# Altium PCB HLK-7621-ALL-KIT-V1.0.PcbDoc (part 1 of 2)
Units mm, origin at the board's own origin, x right, y up, seen from the top; angles counter-clockwise.
Board outline 140 x 100 mm, 2 copper layers (Top Layer, Bottom Layer); 111 components, 238 nets, 733 pads, 557 vias.
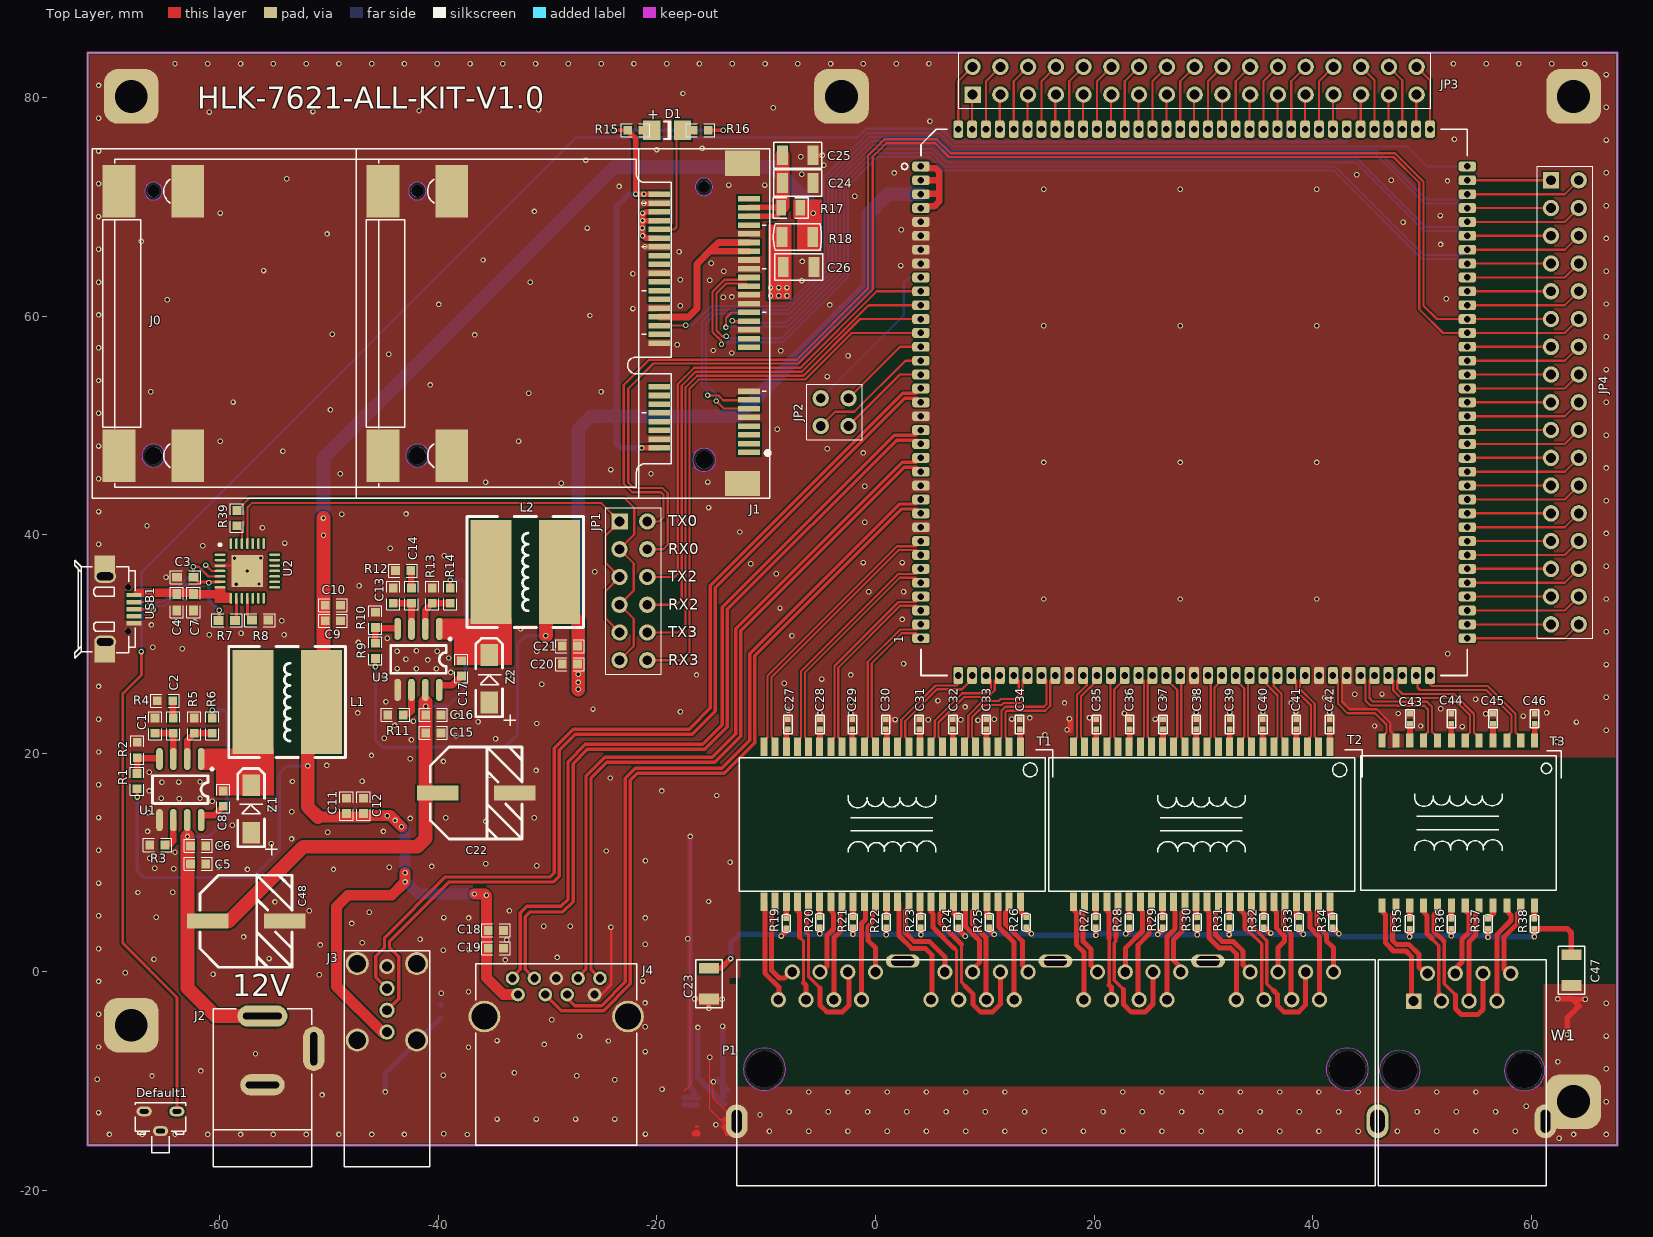
[diagram p0: Top Layer view]
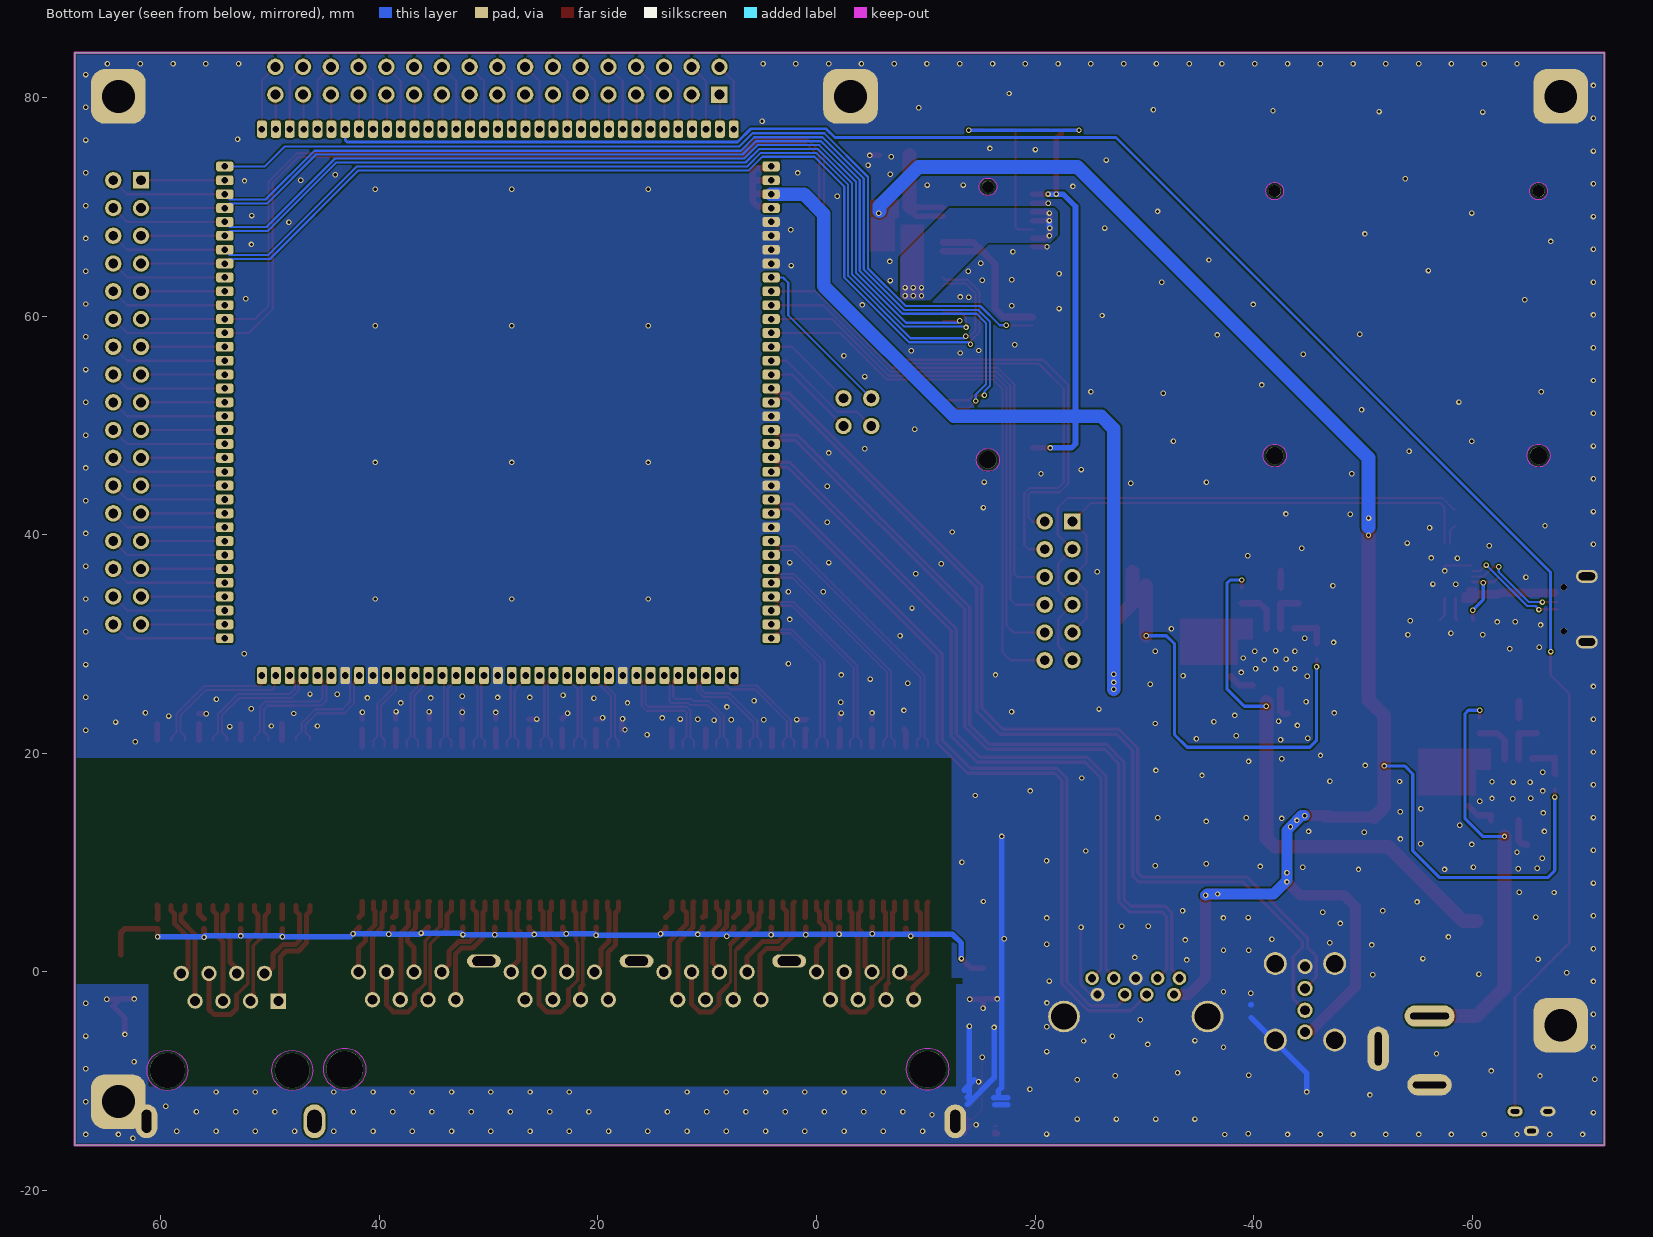
[diagram p1: Bottom Layer view, seen from below]

## Layer stack, top to bottom
Top Solder: solder mask 0.0102, Solder Resist, Dk 3.5
Top Layer: signal copper 0.0356
Dielectric1: core 0.32, FR-4, Dk 4.8
Bottom Layer: signal copper 0.0356
Bottom Solder: solder mask 0.0102, Solder Resist, Dk 3.5

## Board outline
-72.108,-15.865 67.892,-15.865 67.892,84.135 -72.108,84.135

## Design rules (kind name [scope] priority, off if disabled: settings)
Clearance [OnLayer('Keep-Out Layer')] p1: gap=0.102 ignorepadtopadclearanceinfootprint=FALSE except(0: Arc-Hole Track-Hole SMDPad-Hole THPad-Hole Via-Hole Fill-Hole Poly-Hole Region-Hole Text-Hole)
Clearance keepout [(HasFootprint('MICRO_USB'))] p2: gap=0.152 ignorepadtopadclearanceinfootprint=FALSE except(0: Arc-Hole Track-Hole SMDPad-Hole THPad-Hole Via-Hole Fill-Hole Poly-Hole Region-Hole Text-Hole)
Clearance polygons [All] p3 off: gap=0.305 ignorepadtopadclearanceinfootprint=FALSE except(0: Arc-Hole Track-Hole SMDPad-Hole THPad-Hole Via-Hole Fill-Hole Poly-Hole Region-Hole Text-Hole)
Clearance router [All] p4: gap=0.152 ignorepadtopadclearanceinfootprint=FALSE except(0: Arc-Hole Track-Hole SMDPad-Hole THPad-Hole Via-Hole Fill-Hole Poly-Hole Region-Hole Text-Hole)
FabricationTestPointUsage TestPointUsage [All] p1: valid=0 allowmultiple=FALSE
FabricationTestpoint Testpoint [All] p1: side=3 testpointundercomponent=TRUE minsize=1.016 maxsize=2.54 preferedsize=1.524 minholesize=0 maxholesize=1.016 preferedholesize=0.813 testpointgrid=0.025 allowsidetop=TRUE allowsidebottom=TRUE usegrid=TRUE gridtolerance=0
PlaneConnect [All] p1: planeconnectstyle=Direct reliefexpansion=0.508 reliefentries=4 reliefconductorwidth=0.254 reliefairgap=0.254
PolygonConnect [All] p1: connectstyle=Direct reliefconductorwidth=0.254 reliefentries=4 polygonreliefangle="90 Angle" airgapwidth=0.254
RoomDefinition HLK-7621-ALL-KIT-V1.0(020.2.25) [InComponentClass('HLK-7621-ALL-KIT-V1.0(020.2.25)')] p1: confinementstyle=ConfineIn formatcopy=TRUE lockcomponents=FALSE outline -655.224,-555.929 -604.424,-555.929 -604.424,-530.529 -655.224,-530.529
RoutingVias [All] p1: holewidth=0.3 width=0.5 viastyle="Through Hole" minholewidth=0.3 minwidth=0.5 maxholewidth=0.711 maxwidth=1.27
SilkToSolderMaskClearance SilkscreenOverComponentPads [IsPad] p1: minsilkscreentomaskgap=0.254 clearancetoexposedcopper=TRUE
SolderMaskExpansion [All] p1: expansion=0.102
Width [All] p1: maxlimit=2.54 minlimit=0.152 preferedwidth=0.254
26 further rules are at their usual default settings.

## Components (designator, comment, footprint, x,y, rotation, side; value= is the part's Value field where it differs from the comment)
1 "7621" HLK-7621 4.162,73.725 r0 top locked
C1 "NC" 0603 -65.929,22.54 r90 top
C2 "150pF" 0603 -64.26,22.54 r90 top
C3 "10UF" 0603L -63.163,36.117 r0 top
C4 "10UF" 0603L -63.937,33.831 r90 top
C5 "22UF/50v" 0603 -61.985,9.891 r0 top
C6 "22UF/50v" 0603 -61.985,11.542 r0 top
C7 "10UF" 0603L -62.413,33.831 r90 top
C8 "100nF" 0603 -59.688,15.871 r90 top
C9 "22uf" 0603 -49.655,32.141 r0 top
C10 "0.1UF" 0603 -49.655,33.564 r0 top
C11 "22uf" 0603 -48.41,15.199 r90 top
C12 "22uf" 0603 -46.861,15.199 r90 top
C13 "NC" 0603 -44.135,34.453 r90 top
C14 "220PF" 0603 -42.466,34.453 r90 top
C15 "100nF" 0603 -40.471,21.88 r0 top
C16 "100nF" 0603 -40.471,23.531 r0 top
C17 "100nF" 0603 -37.894,27.784 r90 top
C18 "22uf" 0603 -34.737,3.808 r0 top
C19 "0.1uF" 0603 -34.737,2.182 r0 top
C20 "0.1UF" 0603 -27.967,28.179 r180 top
C21 "22uf" 0603 -27.967,29.83 r180 top
C22 "22UF/50v" CAP_SMT_8*10.5 -40.056,16.383 r90 top
C23 "0.01UF" C1206#1 -15.243,-1.06 r270 top
C24 "10uF" C1206#1 -7.124,72.215 r0 top
C25 "10uF" C1206#1 -7.124,74.755 r0 top
C26 "10uF" C1206#1 -7.038,64.526 r0 top
C27 "0.1uF" C0402 -8.018,22.665 r270 top
C28 "0.1uF" C0402 -5.08,22.665 r270 top
C29 "0.1uF" C0402 -2.108,22.665 r270 top
C30 "0.1uF" C0402 0.94,22.665 r270 top
C31 "0.1uF" C0402 3.988,22.665 r270 top
C32 "0.1uF" C0402 7.087,22.665 r270 top
C33 "0.1uF" C0402 10.135,22.665 r270 top
C34 "0.1uF" C0402 13.183,22.665 r270 top
C35 "0.1uF" C0402 20.218,22.665 r270 top
C36 "0.1uF" C0402 23.266,22.665 r270 top
C37 "0.1uF" C0402 26.314,22.665 r270 top
C38 "0.1uF" C0402 29.362,22.665 r270 top
C39 "0.1uF" C0402 32.41,22.665 r270 top
C40 "0.1uF" C0402 35.458,22.665 r270 top
C41 "0.1uF" C0402 38.506,22.665 r270 top
C42 "0.1uF" C0402 41.554,22.665 r270 top
C43 "0.1uF" C0402 48.92,23.173 r270 top
C44 "0.1uF" C0402 52.705,23.173 r270 top
C45 "0.1uF" C0402 56.515,23.173 r270 top
C46 "0.1uF" C0402 60.325,23.173 r270 top
C47 "0.01UF" C1206#1 63.703,0.178 r270 top
C48 "22UF/50v" CAP_SMT_8*10.5 -61.125,4.658 r90 top
D1 "LED" C1206#2 -19.062,77.041 r180 top
Default1 "SW-PB" K5 -65.43,-14.554 r270 top
J1 "" CONSG/54/MINICARD/AS0B22-S68-7F/HALF/FUL -15.683,59.362 r90 top locked
J2 "PWR2.5" CON\DC-JACK\4.7 -56.108,-4.032 r90 top
J3 "" USB/4P/P2.0/DIP/R/F/SUA-110VB-B2N -44.707,-5.502 r270 top locked
J4 "USB3.0" USB3.0/9P/DIP/MAINSUPER -32.718,-2.073 r0 top locked
JP1 "" HDR2X6 -23.421,41.234 r270 top
JP2 "" HDR2X2 -2.466,49.972 r90 top
JP3 "" HDR2X17 8.887,80.3 r0 top
JP4 "2" HDR2X17 61.821,72.455 r270 top
L1 "15uH" CD105 -53.846,24.699 r180 top
L2 "10uH" CD105 -32.052,36.612 r180 top
P1 "Component_2" PHJ8X4_N -10.16,-8.89 r180 top locked
R1 "210K" 0603 -67.587,17.46 r90 top
R2 "40.2K" 0603 -67.562,20.319 r270 top
R3 "200K" 0603 -65.722,11.618 r0 top
R4 "68.1K" 0603 -65.022,24.826 r0 top
R5 "24K" 0603 -62.355,22.54 r270 top
R6 "100K" 0603 -60.704,22.54 r90 top
R7 "10K" 0603L -59.365,32.18 r0 top
R8 "10K" 0603L -56.323,32.205 r180 top
R9 "124K" 0603 -45.768,29.398 r90 top
R10 "40.2K" 0603 -45.768,32.232 r270 top
R11 "200K" 0603 -43.928,23.531 r0 top
R12 "68.1K" 0603 -43.228,36.739 r0 top
R13 "24K" 0603 -40.561,34.453 r270 top
R14 "100K" 0603 -38.91,34.453 r90 top
R15 "4.7K" 0603 -21.971,77.038 r180 top
R16 "4.7K" 0603 -16.002,77.038 r180 top
R17 "0R" L0805 -7.759,69.929 r0 top
R18 "0R" R1206 -7.143,67.269 r180 top
R19 "75R" R0402 -8.166,4.462 r90 top
R20 "75R" R0402 -5.108,4.557 r90 top
R21 "75R" R0402 -2.06,4.557 r90 top
R22 "75R" R0402 0.988,4.557 r90 top
R23 "75R" R0402 4.163,4.557 r90 top
R24 "75R" R0402 7.567,4.557 r90 top
R25 "75R" R0402 10.411,4.557 r90 top
R26 "75R" R0402 13.79,4.557 r90 top
R27 "75R" R0402 20.175,4.557 r90 top
R28 "75R" R0402 23.223,4.557 r90 top
R29 "75R" R0402 26.271,4.557 r90 top
R30 "75R" R0402 29.446,4.557 r90 top
R31 "75R" R0402 32.367,4.557 r90 top
R32 "75R" R0402 35.542,4.557 r90 top
R33 "75R" R0402 38.758,4.557 r90 top
R34 "75R" R0402 41.857,4.557 r90 top
R35 "75R" R0402 48.877,4.404 r90 top
R36 "75R" R0402 52.687,4.404 r90 top
R37 "75R" R0402 56.055,4.404 r90 top
R38 "75R" R0402 60.307,4.404 r90 top
R39 "4.7K" 0603 -58.443,41.539 r270 top
T1 "TRANSFORMER/24P/SMD/HN2429CG" TRANSFORMER/48P/SMD/GS5014LF 1.524,13.513 r180 top
T2 "TRANSFORMER/24P/SMD/HN2429CG" TRANSFORMER/48P/SMD/GS5014LF 29.845,13.513 r180 top
T3 "TRANSFORMER/24P/SMD/HN2429CG" TRANSFORMER/24P/SMD/HN2429CG 53.34,13.64 r180 top
U1 "MP1584EN" SOP8_150 -63.625,16.698 r180 top
U2 "CP2102" cp2102 -57.485,36.701 r0 top
U3 "MP1584EN" SOP8_150 -41.831,28.611 r180 top
USB1 "USB1" usb -70.583,33.185 r270 top
W1 "Component_3" PCBComponent_1 59.411,-9.015 r0 top
Z1 "B340A" SMA -57.148,14.92 r270 top
Z2 "B340A" SMA -35.354,26.833 r270 top

## Footprints (in the part's own frame and the unit in brackets; to place one, negate y for a bottom-side part, rotate by r counter-clockwise, add the part's x,y. Pads: shape width x height; smd on the part's side, far side on the other; paste and mask are expansions set on the pad)
0603 [mm]
  rect 0.8x0.8 smd: 1(-0.7,0) 2(0.7,0)
  silkscreen extent -1.3,-0.6 1.3,0.6
0603L [mm]
  rect 0.9x0.8 smd: 1(-0.75,0) 2(0.75,0)
  silkscreen extent -1.4,-0.6 1.4,0.6
C0402 [mil]
  rect 20x20 smd: 1(-18,0) 2(18,0)
  silkscreen extent -33,-15 33,15
C1206#1 [mm]
  rect 1x1.8 smd: 1(-1.4,0) 2(1.4,0)
  silkscreen extent -2.2,-1.2 2.2,1.2
C1206#2 [mm] "Chip Capacitor; Body 3.2 x 1.6 mm (LxW typ)"
  rect 1.6x1.8 smd: 1(-1.4,0) 2(1.4,0)
  silkscreen extent -0.3,-0.8 0.3,0.8
CAP_SMT_8*10.5 [mm]
  rect 1.4x3.8 smd: 1(0,0) 2(0,-7.051)
  silkscreen extent -4.22,-7.71 4.21,0.69
CD105 [mm] "10*9*5.4mm（长宽高）"
  rect 3.75x9.5 smd: 1(-3.125,0) 2(3.125,0)
  silkscreen extent -5.33,-5.08 5.33,5.08, body extent -4.95,-4.5 4.95,4.5, height 5.5
CON\DC-JACK\4.7 [mm]
  oval 1.956x4.572 hole 0.6 slot 3.556 at 90 deg: 1(0,0)
  oval 1.956x4.064 hole 0.6 slot 3.048 at 90 deg: 2(-6.3,0)
  oval 4.064x1.956 hole 0.6 slot 3.048 at 0 deg: 3(-3,-4.7)
  silkscreen extent -13.8,-4.5 0.65,4.5
CONSG/54/MINICARD/AS0B22-S68-7F/HALF/FUL [mm]
  rect 0.508x2 smd: 1(-11.8,-4.1) 2(-11.4,4.1) 3(-11,-4.1) 4(-10.6,4.1) 5(-10.2,-4.1) 6(-9.8,4.1) 7(-9.4,-4.1) 8(-9,4.1) 9(-8.6,-4.1) 10(-8.2,4.1) 11(-7.8,-4.1) 12(-7.4,4.1) 13(-7,-4.1) 14(-6.6,4.1) 15(-6.2,-4.1) 16(-5.8,4.1) 17(-2.2,-4.1) 18(-1.8,4.1) 19(-1.4,-4.1) 20(-1,4.1) 21(-0.6,-4.1) 22(-0.2,4.1) 23(0.2,-4.1) 24(0.6,4.1) 25(1,-4.1) 26(1.4,4.1) 27(1.8,-4.1) 28(2.2,4.1) 29(2.6,-4.1) 30(3,4.1) 31(3.4,-4.1) 32(3.8,4.1) 33(4.2,-4.1) 34(4.6,4.1) 35(5,-4.1) 36(5.4,4.1) 37(5.8,-4.1) 38(6.2,4.1) 39(6.6,-4.1) 40(7,4.1) 41(7.4,-4.1) 42(7.8,4.1) 43(8.2,-4.1) 44(8.6,4.1) 45(9,-4.1) 46(9.4,4.1) 47(9.8,-4.1) 48(10.2,4.1) 49(10.6,-4.1) 50(11,4.1) 51(11.4,-4.1) 52(11.8,4.1)
  round 1.6 hole 1.6 unplated: 53(-12.5,0) 61(-12.1,26.25) 67(-12.1,50.4)
  round 1.1 hole 1.1 unplated: 54(12.5,0) 62(12.1,26.25) 68(12.1,50.4)
  rect 2.3x3.2 smd: 55(-14.65,-3.5) 56(14.65,-3.5)
  rect 4.8x3 smd: 57(-12.1,23.1) 58(12.1,23.1) 59(-12.1,29.4) 60(12.1,29.4) 63(-12.1,47.25) 64(12.1,47.25) 65(-12.1,53.55) 66(12.1,53.55)
  Keep-Out Layer pour cut-out: -11.046,50.4 -11.126,50.803 -11.355,51.145 -11.697,51.374 -12.1,51.454 -12.1,51.454 -12.503,51.374 -12.845,51.145 -13.074,50.803 -13.154,50.4 -13.154,50.4 -13.074,49.997 -12.845,49.655 -12.503,49.426 -12.1,49.346 -12.1,49.346 -11.697,49.426 -11.355,49.655 -11.126,49.997 -11.046,50.4
  Keep-Out Layer pour cut-out: 12.904,50.4 12.843,50.708 12.669,50.969 12.408,51.143 12.1,51.204 12.1,51.204 11.792,51.143 11.531,50.969 11.357,50.708 11.296,50.4 11.296,50.4 11.357,50.092 11.531,49.831 11.792,49.657 12.1,49.596 12.1,49.596 12.408,49.657 12.669,49.831 12.843,50.092 12.904,50.4
  Keep-Out Layer pour cut-out: -11.046,26.25 -11.126,26.653 -11.355,26.995 -11.697,27.224 -12.1,27.304 -12.1,27.304 -12.503,27.224 -12.845,26.995 -13.074,26.653 -13.154,26.25 -13.154,26.25 -13.074,25.847 -12.845,25.505 -12.503,25.276 -12.1,25.196 -12.1,25.196 -11.697,25.276 -11.355,25.505 -11.126,25.847 -11.046,26.25
  Keep-Out Layer pour cut-out: 12.904,26.25 12.843,26.558 12.669,26.819 12.408,26.993 12.1,27.054 12.1,27.054 11.792,26.993 11.531,26.819 11.357,26.558 11.296,26.25 11.296,26.25 11.357,25.942 11.531,25.681 11.792,25.507 12.1,25.446 12.1,25.446 12.408,25.507 12.669,25.681 12.843,25.942 12.904,26.25
  Keep-Out Layer pour cut-out: -11.446,0 -11.526,0.403 -11.755,0.745 -12.097,0.974 -12.5,1.054 -12.5,1.054 -12.903,0.974 -13.245,0.745 -13.474,0.403 -13.554,0 -13.554,0 -13.474,-0.403 -13.245,-0.745 -12.903,-0.974 -12.5,-1.054 -12.5,-1.054 -12.097,-0.974 -11.755,-0.745 -11.526,-0.403 -11.446,0
  Keep-Out Layer pour cut-out: 13.304,0 13.243,0.308 13.069,0.569 12.808,0.743 12.5,0.804 12.5,0.804 12.192,0.743 11.931,0.569 11.757,0.308 11.696,0 11.696,0 11.757,-0.308 11.931,-0.569 12.192,-0.743 12.5,-0.804 12.5,-0.804 12.808,-0.743 13.069,-0.569 13.243,-0.308 13.304,0
  silkscreen extent -16,-6.16 16,56
cp2102 [mm]
  oval 1x0.23 smd: 1(-2.5,1.5) 2(-2.5,1) 3(-2.5,0.5) 4(-2.5,0) 5(-2.5,-0.5) 6(-2.5,-1) 7(-2.5,-1.5) 15(2.5,-1.5) 16(2.5,-1) 17(2.5,-0.5) 18(2.5,0) 19(2.5,0.5) 20(2.5,1) 21(2.5,1.5)
  oval 0.23x1 smd: 8(-1.5,-2.5) 9(-1,-2.5) 10(-0.5,-2.5) 11(0,-2.5) 12(0.5,-2.5) 13(1,-2.5) 14(1.5,-2.5) 22(1.5,2.5) 23(1,2.5) 24(0.5,2.5) 25(0,2.5) 26(-0.5,2.5) 27(-1,2.5) 28(-1.5,2.5)
  rect 2.9x2.9 smd: 29(0,0)
  silkscreen extent -2.6,2.3 -2.4,2.5
HDR2X2 [mm] "Connector; Header; 2x2 Position"
  round 1.5 hole 0.9: 1(0,0) 2(0,2.54) 3(2.54,0) 4(2.54,2.54)
  silkscreen extent -1.27,-1.27 3.81,3.81
HDR2X6 [mm] "Connector; Header; 6x2 Position"
  rect 1.5x1.5 hole 0.9: 1(0,0)
  round 1.5 hole 0.9: 2(0,2.54) 3(2.54,0) 4(2.54,2.54) 5(5.08,0) 6(5.08,2.54) 7(7.62,0) 8(7.62,2.54) 9(10.16,0) 10(10.16,2.54) 11(12.7,0) 12(12.7,2.54)
  silkscreen extent -1.27,-1.27 13.97,3.81
HDR2X17 [mm] "Connector; Header; 17x2 Position"
  rect 1.5x1.5 hole 0.9: 1(0,0)
  round 1.5 hole 0.9: 2(0,2.54) 3(2.54,0) 4(2.54,2.54) 5(5.08,0) 6(5.08,2.54) 7(7.62,0) 8(7.62,2.54) 9(10.16,0) 10(10.16,2.54) 11(12.7,0) 12(12.7,2.54) 13(15.24,0) 14(15.24,2.54) 15(17.78,0) 16(17.78,2.54) 17(20.32,0) 18(20.32,2.54) 19(22.86,0) 20(22.86,2.54) 21(25.4,0) 22(25.4,2.54) 23(27.94,0) 24(27.94,2.54) 25(30.48,0) 26(30.48,2.54) 27(33.02,0) 28(33.02,2.54) 29(35.56,0) 30(35.56,2.54) 31(38.1,0) 32(38.1,2.54) 33(40.64,0) 34(40.64,2.54)
  silkscreen extent -1.27,-1.27 41.91,3.81
HLK-7621 [mm]
  rrect50% 1.6x0.9 hole 0.6: 1(0,0) 2(0,-1.27) 3(0,-2.54) 4(0,-3.81) 5(0,-5.08) 6(0,-6.35) 7(0,-7.62) 8(0,-8.89) 9(0,-10.16) 10(0,-11.43) 11(0,-12.7) 12(0,-13.97) 13(0,-15.24) 14(0,-16.51) 15(0,-17.78) 16(0,-19.05) 17(0,-20.32) 18(0,-21.59) 19(0,-22.86) 20(0,-24.13) 21(0,-25.4) 22(0,-26.67) 23(0,-27.94) 24(0,-29.21) 25(0,-30.48) 26(0,-31.75) 27(0,-33.02) 28(0,-34.29) 29(0,-35.56) 30(0,-36.83) 31(0,-38.1) 32(0,-39.37) 33(0,-40.64) 34(0,-41.91) 35(0,-43.18) 71(50,-43.18) 72(50,-41.91) 73(50,-40.64) 74(50,-39.37) 75(50,-38.1) 76(50,-36.83) 77(50,-35.56) 78(50,-34.29) 79(50,-33.02) 80(50,-31.75) 81(50,-30.48) 82(50,-29.21) 83(50,-27.94) 84(50,-26.67) 85(50,-25.4) 86(50,-24.13) 87(50,-22.86) 88(50,-21.59) 89(50,-20.32) 90(50,-19.05) 91(50,-17.78) 92(50,-16.51) 93(50,-15.24) 94(50,-13.97) 95(50,-12.7) 96(50,-11.43) 97(50,-10.16) 98(50,-8.89) 99(50,-7.62) 100(50,-6.35) 101(50,-5.08) 102(50,-3.81) 103(50,-2.54) 104(50,-1.27) 105(50,0)
  rrect50% 0.9x1.6 hole 0.6: 36(3.41,-46.59) 37(4.68,-46.59) 38(5.95,-46.59) 39(7.22,-46.59) 40(8.49,-46.59) 41(9.76,-46.59) 42(11.03,-46.59) 43(12.3,-46.59) 44(13.57,-46.59) 45(14.84,-46.59) 46(16.11,-46.59) 47(17.38,-46.59) 48(18.65,-46.59) 49(19.92,-46.59) 50(21.19,-46.59) 51(22.46,-46.59) 52(23.73,-46.59) 53(25,-46.59) 54(26.27,-46.59) 55(27.54,-46.59) 56(28.81,-46.59) 56(28.81,-46.59) 57(30.08,-46.59) 58(31.35,-46.59) 59(32.62,-46.59) 60(33.89,-46.59) 61(35.16,-46.59) 62(36.43,-46.59) 63(37.7,-46.59) 64(38.97,-46.59) 65(40.24,-46.59) 66(41.51,-46.59) 67(42.78,-46.59) 68(44.05,-46.59) 69(45.32,-46.59) 70(46.59,-46.59) 106(46.59,3.41) 107(45.32,3.41) 108(44.05,3.41) 109(42.78,3.41) 110(41.51,3.41) 111(40.24,3.41) 112(38.97,3.41) 113(37.7,3.41) 114(36.43,3.41) 115(35.16,3.41) 116(33.89,3.41) 117(32.62,3.41) 118(31.35,3.41) 119(30.08,3.41) 120(28.81,3.41) 121(27.54,3.41) 122(26.27,3.41) 123(25,3.41) 124(23.73,3.41) 125(22.46,3.41) 126(21.19,3.41) 127(19.92,3.41) 128(18.65,3.41) 129(17.38,3.41) 130(16.11,3.41) 131(14.84,3.41) 132(13.57,3.41) 133(12.3,3.41) 134(11.03,3.41) 135(9.76,3.41) 136(8.49,3.41) 137(7.22,3.41) 138(5.95,3.41) 139(4.68,3.41) 140(3.41,3.41)
  silkscreen extent -1.78,-46.59 50,3.41
K5 [mm]
  oval 0.9x1.4 hole 0.4 slot 0.8 at 90 deg: 1(-1.8,1.5) 2(-1.8,-1.5) 3(0,0)
  silkscreen extent -2.6,-2.3 2,2.3
L0805 [mil]
  rect 34x56 smd: 1(-34.45,0) 2(34.45,0)
  silkscreen extent -62,-38 62,38
PCBComponent_1 [mm]
  rect 1.4x1.4 / inner round 1.4 / far side rect 1.4x1.4 hole 0.9: 1(-10.16,6.35)
  round 1.4 hole 0.9: 2(-8.89,8.89) 3(-7.62,6.35) 4(-6.35,8.89) 5(-5.08,6.35) 6(-3.81,8.89) 7(-2.54,6.35) 8(-1.27,8.89)
  round 3.2 hole 3.2 unplated: 9(-11.43,0) 10(0,0)
  oval 2x3.1 hole 0.9 slot 2.1 at 90 deg: 10(1.905,-4.65)
  oval 2x3.1 hole 1.3 slot 2.1 at 90 deg: ""(-13.462,-4.65)
  Keep-Out Layer pour cut-out: -9.567,0 -9.603,0.363 -9.709,0.713 -9.881,1.035 -10.113,1.317 -10.395,1.549 -10.717,1.721 -11.067,1.827 -11.43,1.863 -11.793,1.827 -12.143,1.721 -12.465,1.549 -12.747,1.317 -12.979,1.035 -13.151,0.713 -13.257,0.363 -13.293,0 -13.257,-0.363 -13.151,-0.713 -12.979,-1.035 -12.747,-1.317 -12.465,-1.549 -12.143,-1.721 -11.793,-1.827 -11.43,-1.863 -11.067,-1.827 -10.717,-1.721 -10.395,-1.549 -10.113,-1.317 -9.881,-1.035 -9.709,-0.713 -9.603,-0.363
  Keep-Out Layer pour cut-out: 1.863,0 1.827,0.363 1.721,0.713 1.549,1.035 1.317,1.317 1.035,1.549 0.713,1.721 0.363,1.827 0,1.863 -0.363,1.827 -0.713,1.721 -1.035,1.549 -1.317,1.317 -1.549,1.035 -1.721,0.713 -1.827,0.363 -1.863,0 -1.827,-0.363 -1.721,-0.713 -1.549,-1.035 -1.317,-1.317 -1.035,-1.549 -0.713,-1.721 -0.363,-1.827 0,-1.863 0.363,-1.827 0.713,-1.721 1.035,-1.549 1.317,-1.317 1.549,-1.035 1.721,-0.713 1.827,-0.363
  silkscreen extent -13.41,-10.55 1.98,10.15
PHJ8X4_N [mil]
  round 55 hole 35: 1(-50,-250) 2(-100,-350) 3(-150,-250) 4(-200,-350) 5(-250,-250) 6(-300,-350) 7(-350,-250) 8(-400,-350) 9(-600,-250) 10(-650,-350) 11(-700,-250) 12(-750,-350) 13(-800,-250) 14(-850,-350) 15(-900,-250) 16(-950,-350) 17(-1150,-250) 18(-1200,-350) 19(-1250,-250) 20(-1300,-350) 21(-1350,-250) 22(-1400,-350) 23(-1450,-250) 24(-1500,-350) 25(-1700,-250) 26(-1750,-350) 27(-1800,-250) 28(-1850,-350) 29(-1900,-250) 30(-1950,-350) 31(-2000,-250) 32(-2050,-350)
  round 132 hole 132 unplated: 33(-2100,0) 34(0,0)
  Keep-Out Layer pour cut-out: 76,0 70.21,29.08 53.74,53.74 29.08,70.21 0,76 0,76 -29.08,70.21 -53.74,53.74 -70.21,29.08 -76,0 -76,0 -70.21,-29.08 -53.74,-53.74 -29.08,-70.21 0,-76 0,-76 29.08,-70.21 53.74,-53.74 70.21,-29.08 76,0
  Keep-Out Layer pour cut-out: -2024,0 -2029.79,29.08 -2046.26,53.74 -2070.92,70.21 -2100,76 -2100,76 -2129.08,70.21 -2153.74,53.74 -2170.21,29.08 -2176,0 -2176,0 -2170.21,-29.08 -2153.74,-53.74 -2129.08,-70.21 -2100,-76 -2100,-76 -2070.92,-70.21 -2046.26,-53.74 -2029.79,-29.08 -2024,0
  silkscreen extent -2200,-395 100,420
R0402 [mil]
  rect 20x20 smd: 1(-18,0) 2(18,0)
  silkscreen extent -33,-15 33,15
R1206 [mm]
  rect 1x1.8 smd: 1(-1.4,0) 2(1.4,0)
  silkscreen extent -2.2,-1.2 2.2,1.2
SMA [mm]
  rect 2x1.6 smd: 1(2.175,0) 2(-2.175,0)
  silkscreen extent -3.7,-1.22 3.47,1.23, body extent -2.72,-1.4 2.77,1.4, height 2.44
SOP8_150 [mil]
  oval 24x80 smd: 1(-75,-110) 2(-25,-110) 3(25,-110) 4(75,-110) 5(75,110) 6(25,110) 7(-25,110) 8(-75,110)
  silkscreen extent -118,-77 100,50, body extent -95,-118 95,118, height 67
TRANSFORMER/24P/SMD/HN2429CG [mm]
  rect 0.66x1.3 smd: 1(-6.985,-7.55) 2(-5.715,-7.55) 3(-4.445,-7.55) 4(-3.175,-7.55) 5(-1.905,-7.55) 6(-0.635,-7.55) 7(0.635,-7.55) 8(1.905,-7.55) 9(3.175,-7.55) 10(4.445,-7.55) 11(5.715,-7.55) 12(6.985,-7.55) 13(6.985,7.55) 14(5.715,7.55) 15(4.445,7.55) 16(3.175,7.55) 17(1.905,7.55) 18(0.635,7.55) 19(-0.635,7.55) 20(-1.905,7.55) 21(-3.175,7.55) 22(-4.445,7.55) 23(-5.715,7.55) 24(-6.985,7.55)
  silkscreen extent -9.42,-6.62 8.95,6.15
TRANSFORMER/48P/SMD/GS5014LF [mm]
  rect 0.64x1.7 smd: 1(-11.73,-7.1) 2(-10.71,-7.1) 3(-9.69,-7.1) 4(-8.67,-7.1) 5(-7.65,-7.1) 6(-6.63,-7.1) 7(-5.61,-7.1) 8(-4.59,-7.1) 9(-3.57,-7.1) 10(-2.55,-7.1) 11(-1.53,-7.1) 12(-0.51,-7.1) 13(0.51,-7.1) 14(1.53,-7.1) 15(2.55,-7.1) 16(3.57,-7.1) 17(4.59,-7.1) 18(5.61,-7.1) 19(6.63,-7.1) 20(7.65,-7.1) 21(8.67,-7.1) 22(9.69,-7.1) 23(10.71,-7.1) 24(11.73,-7.1) 25(11.73,7.1) 26(10.71,7.1) 27(9.69,7.1) 28(8.67,7.1) 29(7.65,7.1) 30(6.63,7.1) 31(5.61,7.1) 32(4.59,7.1) 33(3.57,7.1) 34(2.55,7.1) 35(1.53,7.1) 36(0.51,7.1) 37(-0.51,7.1) 38(-1.53,7.1) 39(-2.55,7.1) 40(-3.57,7.1) 41(-4.59,7.1) 42(-5.61,7.1) 43(-6.63,7.1) 44(-7.65,7.1) 45(-8.67,7.1) 46(-9.69,7.1) 47(-10.71,7.1) 48(-11.73,7.1)
  silkscreen extent -14.69,-6.83 14,6.1
usb [mm]
  oval 1.2x2 hole 0.7 slot 1.5 at 90 deg: 1(-3.028,0.081) 1(2.972,0.081)
  rect 0.4x1.35 smd: 1(1.28,2.719) 2(0.63,2.719) 3(-0.02,2.719) 4(-0.67,2.719) 5(-1.32,2.719)
  round 0.6 hole 0.6: 6(1.98,2.194) 9(-2.02,2.194)
  rect 1.8x1.9 smd: 7(3.98,0.044) 8(-4.02,0.044)
  silkscreen extent -4.52,-2.71 4.48,2.82
USB3.0/9P/DIP/MAINSUPER [mm]
  round 1.25 hole 0.75: 1(0,0) 2(2.5,0) 3(4.5,0) 4(7,0) 5(7.5,1.5) 6(5.5,1.5) 7(3.5,1.5) 8(1.5,1.5) 9(-0.5,1.5)
  round 2.9 hole 2.4: 10(-3.07,-2) 11(10.07,-2)
  silkscreen extent -3.85,-13.78 10.85,2.82
USB/4P/P2.0/DIP/R/F/SUA-110VB-B2N [mm]
  round 1.4 hole 0.9: 1(0,0) 2(-2,0) 3(-4,0) 4(-6,0)
  round 2.1 hole 1.6: 5(0.73,2.72) 6(0.73,-2.72) 7(-6.27,2.72) 8(-6.27,-2.72)
  silkscreen extent -7.44,-3.9 12.33,3.9

## Part data
C1 C2 C3 C4 C7 C8 C9 C10 C11 C12 C13 C14 C15 C16 C17 C18 C19 C20 C21 C23 C24 C25 C26 C27 C28 C29 C30 C31 C32 C33 C34 C35 C36 C37 C38 C39 C40 C41 C42 C43 C44 C45 C46 C47: library part CAP, "Capacitor"
C5 C6 C22 C48: library part "CAPACITOR POL", "Capacitor"
Default1: "Switch", LatestRevisionDate=17-Jul-2002, LatestRevisionNote="Re-released for DXP Platform.", PackageReference=SPST-2, Published=24-Mar-1999, Publisher="Altium Limited"
J1 JP1 U1 U2 U3: library part Component_1
J2: "Low Voltage Power Supply Connector", ComponentLink1Description="Manufacturer Link", ComponentLink1URL=http://domino.kycon.com/internet/Products.html, DatasheetDocument=09-May-2002, Published=17-Dec-2003, Publisher="Altium Limited"
J3 JP2 JP3: library part 2
J4: library part USB3.0/9P/DIP/MAINSUPER
L1 L2: library part INDUCTOR1
R1 R2 R3 R4 R5 R6 R7 R8 R9 R10 R11 R12 R13 R14 R15 R16 R17 R18 R19 R20 R21 R22 R23 R24 R25 R26 R27 R28 R29 R30 R31 R32 R33 R34 R35 R36 R37 R38 R39: library part Res2, "Resistor", LatestRevisionDate=17-Jul-2002, LatestRevisionNote="Re-released for DXP Platform.", PackageReference=AXIAL-0.4, Published=8-Jun-2000, Publisher="Altium Limited"
USB1: library part USB-B
Z1 Z2: library part ZENER2, "Zener Diode"

## Free pads (board coordinates)
  rrect50% 5x5 hole 3: 1(-68.108,-4.865) 1(-68.108,80.135) 1(-3.108,80.135) 1(63.892,-11.865) 1(63.892,80.135)
  oval 2x3.1 hole 0.9 slot 2.1 at 90 deg: ""(-12.698,-13.667)
  oval 3.1x1.2 hole 0.9 slot 2.1 at 0 deg: ""(2.5,1.001) ""(16.47,1.001) ""(30.44,1.001)

## Via types
v1: diameter 0.5, hole 0.3, Top Layer to Bottom Layer, tented both sides, 557 vias

## Nets (pads, with @x,y where several pads share a name; then routed paths per layer and width w, separated by ;. In a path a pad name is that pad's centre, name@x,y a point inside that pad or via, vN(x,y) a via of type N, cw(c..) or ccw(c..) an arc to the next point about the centre after c; other vN are vias at no path point)
3.3V: 1.1 1.2 1.3 1.4 C20.1 C21.1 J1.2 J1.52 L2.1 R9.1 R15.2 R16.1 | length 175.8
  Top Layer w0.3: v1@-45.781,27.937 R9.1@-45.781,28.66
  Top Layer w0.305: v1(-24.023,77.025) -22.508,77.025 R15.2@-22.475,76.992 ; R16.1@-15.302,77.045 v1(-13.929,77.045)
  Top Layer w0.508: R15.2@-22.377,76.708 -21.932,76.262 v1(-21.932,71.199) v1(-21.195,71.199) -19.783,71.199 J1.52@-19.783,71.162 ; v1(-21.392,47.962) J1.2@-19.783,47.962
  Top Layer w0.6: 1.4@4.162,69.915 4.312,70.065 5.389,70.065 5.844,70.521 5.844,71.206 ; 1.3@4.162,71.185 4.183,71.206 5.844,71.206 ; 1.2@4.162,72.455 4.166,72.451 5.844,72.451 ; 1.1@4.162,73.725 4.312,73.575 5.488,73.575 5.844,73.218 5.844,72.451 ; 5.844,71.206 5.844,72.451
  Top Layer w1.27: v1(-30.167,30.775) L2.1@-30.167,35.372 ; L2.1@-28.927,36.612 -28.927,33.737 -27.201,32.01 v1(-27.201,27.239) v1(-27.201,26.502) v1(-27.201,25.867)
  Bottom Layer w0.3: v1(-45.768,27.925) -45.768,21.194 -45.133,20.559 -33.932,20.559 -32.764,21.727 -32.764,30.033 -32.022,30.775 v1(-30.167,30.775)
  Bottom Layer w0.305: v1@-23.82,77.038 v1@-13.929,77.038
  Bottom Layer w0.508: v1(-21.392,47.962) -23.337,47.962 -23.701,48.326 -23.701,50.861 -23.701,70.063 -22.565,71.199 v1(-21.932,71.199) v1(-21.195,71.199)
  Bottom Layer w1.27: v1@-27.201,25.893 v1(-27.201,26.502) v1(-27.201,27.239) -27.201,49.718 -26.058,50.861 -23.701,50.861 -12.597,50.861 -0.658,62.8 -0.658,69.382 1.145,71.185 1.3@4.162,71.185
3.3V_AUX0: J1.24 J1.39 J1.41 | length 17
  Top Layer w0.635: J1.24@-19.783,59.962 -17.109,59.962 -16.33,60.742 -16.33,64.811 -15.178,65.962 ; J1.39@-11.583,65.962 -15.178,65.962 ; J1.41@-11.583,66.762 -14.378,66.762 -15.178,65.962
5V: C4.2 C7.2 U2.7 U2.8 USB1.5 | length 7.4
  Top Layer w0.8: -67.49,34.707 -66.393,34.707 -62.539,34.707 C7.2@-62.413,34.581 -60.098,34.581
5VD: C9.1 C10.1 C11.1 C12.1 C18.1 C19.1 J3.1 J4.1 L1.1 R1.1 R17.2 R18.1 | length 183.9
  Top Layer w0.3: R1.1@-67.587,16.76 -67.574,16.747 -67.574,16.025 v1(-67.562,16.012)
  Top Layer w0.508: -6.031,69.929 -6.012,69.961 -5.644,70.329 -5.396,70.081 -5.396,69.929 -5.701,69.624 v1(-5.701,69.446)
  Top Layer w1: -51.026,14.183 -46.454,14.183 ; C12.1@-46.861,14.31 v1(-44.676,14.31) -44.397,14.31 v1(-43.381,13.294) ; J3.1@-44.707,-5.502 -45.138,-5.502 -49.329,-1.311 -49.329,5.974 -48.283,7.021 -44.27,7.021 v1(-43.051,8.24) v1(-43.051,9.078) ; v1(-36.703,7.137) -35.725,7.137 v1(-35.608,7.021) -35.608,4.135 -35.608,-0.528 -34.064,-2.073 J4.1@-32.718,-2.073
  Top Layer w1.27: -51.026,14.183 -51.961,15.118 v1(-51.961,18.862) -51.961,23.459 L1.1@-50.721,24.699 -50.52,24.899 v1(-50.52,41.541) ; R17.2@-6.884,69.929 -6.031,69.929
  Bottom Layer w0.3: v1(-67.562,16.012) -67.562,9.281 -66.927,8.646 -57.021,8.646 -54.557,11.11 -54.557,18.12 -53.815,18.862 v1(-51.961,18.862)
  Bottom Layer w0.508: J3.1@-44.787,-5.421 J3.1@-44.707,-5.502
  Bottom Layer w1: v1(-44.676,14.31) -44.397,14.31 v1(-43.381,13.294) -43.051,12.964 v1(-43.051,9.078) -43.051,8.367 -41.831,7.148 -35.735,7.148 v1(-35.608,7.021)
  Bottom Layer w1.27: -50.518,40.726 -50.518,47.056 -23.904,73.67 -9.324,73.67 -5.764,70.11 v1@-5.764,69.661
  other v1: -43.967,13.868 -50.518,39.964
5VD_E_G: C26.1 J1.42 J1.46 J1.48 R18.2 | length 7.3
  Top Layer w0.102: v1@-21.322,68.76 v1@-21.297,68.735
  Top Layer w0.508: J1.42@-19.783,67.162 -21.037,67.162 -21.322,67.447 -21.322,68.202 -21.322,68.76 v1@-21.322,68.762 ; J1.46@-19.783,68.762 v1@-21.322,68.762 ; J1.48@-19.783,69.562 -21.037,69.562 -21.322,69.278 v1@-21.322,68.762
  Bottom Layer w0.508: v1@-21.322,68.202 -21.31,68.202 -21.31,68.735 v1@-21.297,68.735
  other v1: -9.608,61.885 -8.858,61.885 -8.108,61.885 -9.608,62.635 -8.858,62.635 -8.108,62.635 -21.313,67.371 -21.339,68.082 -21.313,68.768 -21.313,69.454
12V: C5.1 C6.1 C15.1 C16.1 C22.1 C48.1 J2.1 R6.2 R14.2 U1.7 U3.7 | length 89
  Top Layer w0.3: v1(-60.704,23.962) R6.2@-60.704,23.24 R6.2@-60.627,23.316 ; R14.2@-38.91,35.153 v1(-38.91,35.875)
  Top Layer w1.27: v1(-62.964,12.405) -62.964,11.542 -62.964,9.891 -62.964,-1.457 -60.389,-4.032 J2.1@-56.108,-4.032 ; C48.1@-60.428,4.658 -59.154,4.658 -52.347,11.466 -41.933,11.466 -41.196,12.202 -41.196,24.318 -41.196,24.699
  Bottom Layer w0.3: v1(-62.964,12.405) -60.958,12.405 -59.357,14.006 -59.357,23.658 -59.662,23.962 v1(-60.704,23.962) ; v1(-41.171,24.318) -39.164,24.318 -37.564,25.918 -37.564,35.57 -37.869,35.875 v1(-38.91,35.875)
D+: U2.4 USB1.3 | length 9.8
  Top Layer w0.203: USB1.3@-67.864,33.205 -66.151,33.205 v1(-66.119,33.173) ; v1(-61.293,37.247) -60.747,36.701 U2.4@-59.985,36.701
  Bottom Layer w0.203: v1(-66.119,33.173) -65.8,33.491 -65.048,33.491 v1(-61.293,37.247)
D-: U2.5 USB1.4 | length 9.9
  Top Layer w0.203: USB1.4@-67.864,33.855 v1(-66.437,33.855) ; v1(-62.436,37.094) -61.928,37.094 -61.035,36.201 U2.5@-59.985,36.201
  Bottom Layer w0.203: v1(-66.437,33.855) -65.193,33.855 -62.436,36.612 v1(-62.436,37.094)
GND: 1.5 1.6 1.7 1.8 1.19 1.24 1.27 1.44 1.53 1.62 1.64 C1.2 C3.1 C4.1 C5.2 C6.2 C7.1 C9.2 C10.2 C11.2 C12.2 C13.2 C15.2 C16.2 C18.2 C19.2 C20.2 C21.2 C22.2 C23.2 C24.2 C25.2 C26.2 C27.1 C28.1 C29.1 C30.1 C31.1 C32.1 C33.1 C34.1 C35.1 C36.1 C37.1 C38.1 C39.1 C40.1 C41.1 C42.1 C43.1 C44.1 C45.1 C46.1 C47.2 C48.2 Default1.2 Default1.3 J1.4 J1.9 J1.15 J1.18 J1.21 J1.26 J1.27 J1.29 J1.34 J1.35 J1.37 J1.40 J1.43 J1.50 J1.55 J1.56 J1.57 J1.58 J1.59 J1.60 J1.63 J1.64 J1.65 J1.66 J2.2 J2.3 J3.4 J3.5 J3.6 J3.7 J3.8 J4.4 J4.7 J4.10 J4.11 pad.1 pad.@-12.698,-13.667 R2.1 R3.1 R4.1 R5.1 R8.1 R10.1 R11.1 R12.1 R13.1 T3.11 U1.5 U2.3 U2.29 U3.5 USB1.1 USB1.6 USB1.7 USB1.8 USB1.9 W1.10 Z1.1 Z2.1 | length 141.5
  Top Layer w0.102: -17.482,-10.889 -16.942,-10.349 v1(-16.942,12.405) ; -16.563,-14.472 -16.163,-14.472 -16.163,-14.666 -16.279,-14.782 ; -16.563,-14.145 -16.163,-14.145 ; -16.563,-14.072 -16.163,-14.072 ; v1(-15.161,-7.813) -15.161,-12.563 pad.@-12.885,-14.84 ; v1(-14.834,-10.033) -14.834,-11.568 pad.@-12.938,-13.464 ; v1(-14.603,-13.985) -13.124,-13.985 pad.@-12.924,-14.185 ; -14.163,-13.464 -13.763,-13.464 -13.763,-14.185 ; -13.576,-14.771 -14.163,-14.185 ; -14.163,-14.185 -13.763,-14.185 ; -14.163,-14.185 -13.763,-14.185
  Top Layer w0.203: U2.3@-59.985,37.201 -57.485,37.201 v1(-57.485,36.701) ; 1.64@43.132,27.135 42.695,26.698 42.695,24.755 43.406,24.044 45.865,24.044 47.114,22.794 47.114,22.02 47.625,21.51 T3.11@47.625,21.19
  Top Layer w0.254: J4.4@-25.718,-2.073 -25.091,-2.073 -24.178,-1.16 -24.178,4.066 v1(-24.216,4.103)
  Top Layer w0.508: v1(-21.221,70.361) -21.168,70.361 -21.166,70.362 J1.50@-19.783,70.362 ; v1(-21.094,66.373) -19.783,66.373 J1.40@-19.783,66.362 ; -16.563,-14.782 -16.279,-14.782 ; v1(-16.547,-2.468) C23.2@-15.312,-2.468 ; v1(-15.243,-3.32) C23.2@-15.243,-2.485 ; v1(-14.019,-2.485) C23.2@-15.243,-2.485 ; -13.763,-14.185 pad.@-12.924,-14.185 ; -13.763,-13.464 pad.@-12.938,-13.464 ; -13.576,-14.771 pad.@-12.953,-14.771 ; C25.2@-5.724,74.755 -5.724,74.729 v1(-4.863,74.729) ; C28.1@-5.08,23.122 v1(-5.08,23.707) ; v1(-2.257,23.701) -2.108,23.552 C29.1@-2.108,23.122 ; C30.1@0.94,23.122 0.964,23.099 v1(1.806,23.099) ; 17.806,22.149 v1@17.806,23.18 ; v1(19.583,23.275) 19.736,23.122 C35.1@20.218,23.122 ; v1(22.784,23.681) 22.787,23.684 23.266,23.204 C36.1@23.266,23.122 ; v1(25.603,23.148) 25.603,23.122 C37.1@26.314,23.122 ; C38.1@29.362,23.122 v1(29.362,23.757) ; C39.1@32.41,23.122 v1(32.41,23.783) 32.41,24.061 ; C40.1@35.458,23.122 v1(35.458,23.808) ; v1(38.481,23.834) 38.506,23.834 C41.1@38.506,23.122 ; C42.1@41.554,23.122 v1(41.554,23.783) ; v1(55.855,23.63) C45.1@56.515,23.63 ; v1(62.441,-2.468) 63.675,-2.468 ; v1(63.297,-5.715) 63.297,-4.221 64.389,-3.129 63.745,-2.485 ; v1(64.968,-2.485) 63.745,-2.485 ; C23.2@-15.312,-2.468 -15.312,-2.46 C23.2@-15.243,-2.46 C23.2@-15.243,-2.485 ; C23.2@-15.312,-2.468 -15.312,-2.485 C23.2@-15.243,-2.485 ; 63.675,-2.468 63.675,-2.485 63.745,-2.485 ; 63.675,-2.468 63.675,-2.46 63.745,-2.46 63.745,-2.485
  Bottom Layer w0.102: -16.615,-11.496 -16.22,-11.515 ; -14.215,-12.121 -13.815,-12.121 -13.815,-11.496 -13.815,-11.446 ; -14.215,-11.446 -13.815,-11.446 ; -13.508,-10.801 -13.815,-11.107 -13.815,-11.446
  Bottom Layer w0.508: v1(-44.856,-10.973) -44.856,-9.258 -39.768,-4.169 ; -39.768,-3.012 -39.754,-3.012 ; -17.514,-11.515 -16.22,-11.515 ; -17.482,-12.152 -16.336,-12.152 ; v1(-16.942,12.405) -16.942,-10.569 -16.615,-10.896 -16.615,-11.496 ; v1(-16.254,-5.07) -16.254,-9.682 -13.815,-12.121 ; -14.45,-9.858 -13.508,-10.801 ; v1(-13.993,-4.968) -13.993,-11.268 -13.815,-11.446
  other v1: 62.563,-15.204 -70.108,-14.865 -67.108,-14.865 -64.108,-14.865 -61.108,-14.865 -58.108,-14.865 -55.108,-14.865 -52.108,-14.865 -49.108,-14.865 -46.108,-14.865 -43.108,-14.865 -37.353,-14.871 63.892,-14.865 66.892,-14.865 -21.051,-14.834 -39.521,-14.796 -9.705,-14.576 -6.113,-14.576 -2.521,-14.576 1.071,-14.576 4.663,-14.576 8.256,-14.576 11.848,-14.576 15.44,-14.576 19.032,-14.576 22.624,-14.576 26.216,-14.576 29.808,-14.576 33.4,-14.576 36.992,-14.576 40.584,-14.576 44.177,-14.576 47.769,-14.576 51.361,-14.576 54.953,-14.576 58.545,-14.576 -34.636,-13.463 -31.044,-13.463 -27.452,-13.463 -23.86,-13.463 -10.569,-13.071 -71.108,-12.865 -7.909,-12.78 -4.317,-12.78 -0.725,-12.78 2.867,-12.78 6.459,-12.78 10.052,-12.78 13.644,-12.78 20.828,-12.78 24.42,-12.78 28.012,-12.78 31.604,-12.78 35.196,-12.78 38.788,-12.78 42.381,-12.78 49.565,-12.78 53.157,-12.78 56.749,-12.78 59.565,-12.283 66.892,-11.865 -50.648,-11.252 -6.113,-10.984 -2.521,-10.984 1.071,-10.984 4.663,-10.984 8.256,-10.984 11.848,-10.984 22.624,-10.984 26.216,-10.984 29.808,-10.984 33.4,-10.984 36.992,-10.984 40.584,-10.984 44.177,-10.984 51.361,-10.984 54.953,-10.984 -19.533,-10.719 -23.86,-9.871 -71.219,-9.82 -66.215,-9.515 -27.33,-9.5 -39.555,-9.439 -33.045,-9.22 -61.745,-9.058 66.892,-8.865 62.459,-8.204 -56.741,-7.483 -21.078,-7.281 -37.247,-6.899 -71.108,-6.865 -30.302,-6.629 -24.437,-6.314 -34.636,-6.279 -27.079,-5.883 66.892,-5.865 -21.078,-5 -29.619,-4.359 -71.108,-3.865 66.892,-2.865 -21.088,-2.831 -39.754,-1.946 -37.247,-1.819 -71.108,-0.865 -21.288,-0.828 -50.899,-0.244 -60.627,-0.218 -68.654,-0.066 -33.886,1.102 -66.038,1.179 -55.497,1.229 -29.134,1.329 -39.555,1.991 -37.247,1.991 -71.108,2.135 -50.823,2.474 -21.065,2.543 -46.962,2.677 -33.754,2.931 -41.681,2.997 -17.177,3.048 -57.833,3.211 -30.353,4.191 -27.94,4.191 -47.93,4.445 -37.24,4.946 -21.078,4.946 -39.521,4.983 -65.834,5.014 -71.108,5.135 -46.327,5.471 -51.814,5.598 -33.5,5.598 -54.963,6.411 -15.28,6.452 -67.498,7.275 -64.322,7.3 -71.108,8.135 -57.478,9.383 -49.604,9.383 -64.234,9.459 -65.962,9.484 -60.119,9.586 -44.498,9.586 -40.612,9.662 -31.002,9.713 -35.659,9.916 -13.307,10.043 -21.054,10.17 -66.409,10.399 -64.107,10.958 -24.638,11.074 -71.108,11.135 -59.967,11.677 -55.293,11.745 -53.439,12.179 -50.137,12.797 -66.622,12.863 -45.032,12.863 -58.875,13.42 -35.659,13.777 -42.568,14.056 -39.342,14.107 -31.218,14.107 -71.108,14.135 -66.52,14.556 -53.414,14.666 -55.319,14.934 -60.704,15.633 -63.731,15.86 -61.821,15.885 -65.376,15.911 -14.529,16.154 -66.469,16.571 -19.558,16.571 -71.108,17.135 -65.301,17.358 -63.758,17.384 -61.821,17.409 -53.363,17.435 -46.988,17.46 -24.282,17.755 -35.279,17.993 -66.469,18.273 -31.062,18.451 -50.213,18.908 -39.545,19.273 -42.568,19.517 -46.124,19.822 -71.108,20.135 62.351,21.076 -42.466,21.245 -34.77,21.346 -44.956,21.397 -38.402,21.626 15.51,21.714 66.892,22.135 17.528,22.159 53.693,22.464 45.672,22.515 49.883,22.515 -44.016,22.565 -31.002,22.743 64.147,22.872 -36.37,22.896 -42.289,22.946 9.373,23.038 4.828,23.073 7.8,23.073 -71.108,23.135 10.874,23.135 12.471,23.148 17.75,23.178 14.125,23.251 59.273,23.421 -38.275,23.48 47.856,23.658 -47.394,23.708 61.42,23.734 -17.854,23.81 -8.004,23.937 -25.855,24.064 51.742,24.089 8.202,24.257 17.3,24.623 38.052,24.623 -2.207,24.699 -44.803,24.724 5.715,24.816 54.917,24.953 20.373,25.055 35.308,25.08 41.1,25.08 26.241,25.131 29.187,25.131 66.892,25.135 32.413,25.232 23.193,25.334 43.868,25.41 46.357,25.436 -71.108,26.135 -30.554,26.325 -8.354,26.426 -4.925,26.807 -44.905,27.061 -33.551,27.112 -16.381,27.188 -2.258,27.188 -38.86,27.417 -42.009,27.746 -40.18,27.746 -43.762,27.772 66.892,28.135 2.568,28.204 -40.968,28.56 -42.974,28.611 -39.046,28.738 52.377,29.119 -43.787,29.347 -40.108,29.347 -31.011,29.347 -42.009,29.398 -63.447,29.576 -66.139,29.728 -47.318,30.16 -44.68,30.545 -7.645,30.785 -60.983,30.871 -54.125,30.871 -58.062,30.998 66.892,31.135 -32.484,31.405 -66.266,31.76 -62.309,32.04 -63.96,32.065 -54.328,32.141 2.441,32.268 -8.738,33.31 15.392,34.135 27.892,34.135 40.392,34.135 66.892,34.135 -0.607,34.808 2.568,34.808 -47.267,35.342 -58.501,35.482 -56.419,35.507 -64.925,36.117 -9.093,36.449 -25.702,36.637 66.892,37.135 -11.405,37.351 -1.115,37.475 2.441,37.475 -58.654,37.87 -56.266,37.895 -39.469,38.085 -44.397,38.771 -61.567,38.999 -71.108,39.135 -54.074,39.253 66.892,40.135 -12.418,40.269 -56.106,40.65 -66.673,40.828 -0.988,41.158 -48.842,41.895 -42.959,41.92 -71.108,42.135 -15.28,42.504 66.892,43.135 -0.988,44.46 -28.75,44.74 -35.685,44.816 -15.339,44.841 -71.108,45.135 -48.994,45.603 -20.546,45.603 -24.229,45.984 66.892,46.135 15.392,46.635 27.892,46.635 40.392,46.635 -1.115,47.508 -54.227,47.666 -4.417,47.889 -71.108,48.135 -59.967,48.575 -32.662,48.575 66.892,49.135 -8.989,49.667 -71.108,51.135 -49.883,51.445 -58.799,52.156 66.892,52.135 -31.722,52.969 -66.318,53.096 -25.118,53.096 -40.739,53.731 -71.108,54.135 -4.417,54.493 66.892,55.135 -2.512,56.398 -44.549,56.525 -13.155,56.652 -8.659,56.855 -14.857,56.881 -71.108,57.135 -18.133,57.414 66.892,58.135 -36.675,58.303 -49.705,58.379 15.392,59.135 27.892,59.135 40.392,59.135 -26.134,60.081 -71.108,60.135 -22.197,60.716 -17.879,60.97 -4.189,61.046 -39.977,61.097 66.892,61.135 -64.818,61.529 52.225,61.605 -13.942,61.758 -13.155,61.783 -31.595,63.129 -71.108,63.135 -6.754,63.282 -15.161,63.307 -17.879,63.358 -22.197,63.891 -13.891,64.145 66.892,64.135 -56.005,64.196 2.314,64.653 -15.034,64.856 -6.703,65.034 -35.913,65.161 -17.981,65.923 -71.108,66.135 51.717,66.584 -67.206,66.863 66.892,67.135 -50.188,67.549 2.365,67.93 -26.388,68.082 48.288,68.616 -71.108,69.135 51.691,69.225 -59.967,69.454 -31.214,69.606 66.892,70.135 -1.903,71.003 15.392,71.635 27.892,71.635 40.392,71.635 -23.467,71.892 -13.434,72.019 -10.132,72.019 -71.108,72.135 52.352,72.4 47.196,72.451 -53.871,72.603 44.046,72.959 -6.754,73.01 1.73,73.126 66.892,73.135 -4.722,73.823 -26.515,74.305 -6.83,74.61 -71.108,75.135 -20.038,75.27 -15.873,75.372 66.892,76.135 52.987,76.21 4.981,77.861 -71.108,78.135 -60.983,78.699 -51.483,78.75 -41.777,78.826 -30.833,78.903 -9.345,79.106 66.892,79.135 -17.625,80.401 -71.108,81.135 66.892,82.135 -64.108,83.135 -61.108,83.135 -58.108,83.135 -55.108,83.135 -52.108,83.135 -49.108,83.135 -46.108,83.135 -43.108,83.135 -40.108,83.135 -37.108,83.135 -34.108,83.135 -31.108,83.135 -28.108,83.135 -25.108,83.135 -22.108,83.135 -19.108,83.135 -16.108,83.135 -13.108,83.135 -10.108,83.135 -7.108,83.135 -4.108,83.135 -1.108,83.135 1.892,83.135 4.892,83.135 52.892,83.135 55.892,83.135 58.892,83.135 61.892,83.135 64.892,83.135
LED_WLAN_SOCKET: D1.1 J1.44 R16.2 | length 12.2
  Top Layer w0.203: J1.44@-19.783,67.962 -18.425,67.962 -18.214,68.173 -18.214,76.943 D1.1@-18.312,77.041
  Top Layer w0.254: D1.1@-18.312,77.041 -18.304,77.048 R16.2@-16.702,77.048
Net1_9: 1.9 JP2.4 | length 15.5
  Bottom Layer w0.203: JP2.4@-5.006,52.512 2.588,60.107 2.588,63.078 3.075,63.565 1.9@4.162,63.565
Net1_14: 1.14 JP2.3 | length 8.6
  Top Layer w0.203: JP2.3@-2.466,52.512 2.237,57.215 1.14@4.162,57.215
Net1_15: 1.15 JP2.2 | length 11.6
  Top Layer w0.203: JP2.2@-5.006,49.972 -3.711,51.267 -1.933,51.267 2.745,55.945 1.15@4.162,55.945
Net1_16: 1.16 JP2.1 | length 8.6
  Top Layer w0.203: JP2.1@-2.466,49.972 2.237,54.675 1.16@4.162,54.675
Net1_17: 1.17 J3.3 | length 88.6
  Top Layer w0.305: J3.3@-44.707,-1.502 -45.748,-0.46 -45.748,1.458 -44.935,2.271 -44.935,3.155 -39.393,8.697 -29.78,8.697 -29.397,9.08 -29.397,20.496 -27.665,22.228 -17.048,22.228 -15.111,24.166 -15.111,35.352 2.506,52.969 3.726,52.969 1.17@4.162,53.405
Net1_18: 1.18 J3.2 | length 89.8
  Top Layer w0.305: J3.2@-44.707,-3.502 -43.64,-2.435 -43.64,1.407 -44.478,2.245 -44.478,2.774 -39.012,8.24 -29.462,8.24 -28.94,8.762 -28.94,20.306 -27.475,21.771 -16.769,21.771 -14.653,23.886 -14.653,35.163 2.696,52.512 3.785,52.512 1.18@4.162,52.135
Net1_20: 1.20 J4.9 | length 74.9
  Top Layer w0.305: J4.9@-33.218,-0.573 -33.218,-0.449 -32.515,0.255 -32.515,5.42 -31.93,6.005 -28.801,6.005 -28.141,6.665 -28.141,19.255 -26.562,20.834 -15.826,20.834 -14.018,22.642 -14.018,33.378 1.738,49.134 3.7,49.134 1.20@4.162,49.595
Net1_21: 1.21 J4.8 | length 74.1
  Top Layer w0.305: J4.8@-31.218,-0.573 -32.053,0.263 -32.053,3.21 -32.057,3.214 -32.057,5.039 -31.6,5.497 -28.604,5.497 -27.674,6.427 -27.674,19.076 -26.378,20.371 -15.642,20.371 -13.561,22.452 -13.561,33.188 1.927,48.677 3.81,48.677 1.21@4.162,48.325
Net1_22: 1.22 J4.6 | length 67.1
  Top Layer w0.305: J4.6@-27.218,-0.573 -27.218,-0.488 -26.495,0.235 -26.495,17.924 -24.759,19.66 -14.918,19.66 -12.774,21.803 -12.774,31.41 2.461,46.645 3.751,46.645 1.22@4.162,47.055
Net1_23: 1.23 J4.5 | length 66.4
  Top Layer w0.305: J4.5@-25.218,-0.573 -26.038,0.247 -26.038,17.734 -24.585,19.187 -14.704,19.187 -12.317,21.575 -12.317,31.22 2.651,46.187 3.76,46.187 1.23@4.162,45.785
Net1_25: 1.25 J4.3 | length 67.7
  Top Layer w0.305: J4.3@-28.218,-2.073 -28.218,-2.407 -27.536,-3.089 -25.072,-3.089 -22.888,-0.904 -22.888,17.739 -21.971,18.656 -14.067,18.656 -11.504,21.219 -11.504,29.124 2.207,42.835 3.751,42.835 1.25@4.162,43.245
Net1_26: 1.26 J4.2 | length 69.8
  Top Layer w0.305: J4.2@-30.218,-2.073 -28.745,-3.546 -24.883,-3.546 -22.431,-1.094 -22.431,17.55 -21.782,18.199 -13.824,18.199 -11.047,20.977 -11.047,28.934 2.397,42.377 3.76,42.377 1.26@4.162,41.975
Net1_28: 1.28 T1.24 | length 25.8
  Top Layer w0.203: T1.24@-10.206,20.613 -10.206,21.167 -9.879,21.494 -9.879,27.116 1.979,38.974 3.7,38.974 1.28@4.162,39.435
Net1_29: 1.29 T1.23 | length 25.2
  Top Layer w0.203: T1.23@-9.186,20.613 -9.186,21.188 -9.523,21.525 -9.523,26.969 2.126,38.618 3.709,38.618 1.29@4.162,38.165
Net1_30: 1.30 T1.21 | length 21.9
  Top Layer w0.203: T1.21@-7.146,20.613 -7.146,21.167 -6.819,21.494 -6.819,27.535 2.08,36.434 3.7,36.434 1.30@4.162,36.895
Net1_31: 1.31 T1.20 | length 21.3
  Top Layer w0.203: T1.20@-6.126,20.613 -6.126,21.188 -6.463,21.525 -6.463,27.387 2.228,36.078 3.709,36.078 1.31@4.162,35.625
Net1_32: 1.32 T1.18 | length 18.1
  Top Layer w0.203: T1.18@-4.086,20.613 -4.086,21.167 -3.759,21.494 -3.759,28.004 2.106,33.868 3.675,33.868 1.32@4.162,34.355
Net1_33: 1.33 T1.17 | length 17.5
  Top Layer w0.203: T1.17@-3.066,20.613 -3.066,21.188 -3.403,21.525 -3.403,27.856 2.253,33.513 3.734,33.513 1.33@4.162,33.085
Net1_34: 1.34 T1.15 | length 14.2
  Top Layer w0.203: T1.15@-1.026,20.613 -1.026,21.167 -0.699,21.494 -0.699,28.392 2.263,31.354 3.7,31.354 1.34@4.162,31.815
Net1_35: 1.35 T1.14 | length 13.6
  Top Layer w0.203: T1.14@-0.006,20.613 -0.006,21.188 -0.343,21.525 -0.343,28.244 2.41,30.998 3.709,30.998 1.35@4.162,30.545
Net1_36: 1.36 T1.12 | length 10
  Top Layer w0.203: T1.12@2.034,20.613 2.034,21.167 2.361,21.494 2.361,23.095 5.489,26.223 7.445,26.223 7.572,26.35 1.36@7.572,27.135